# EAGLE board projekt_główny (EAGLE 9.6.2)
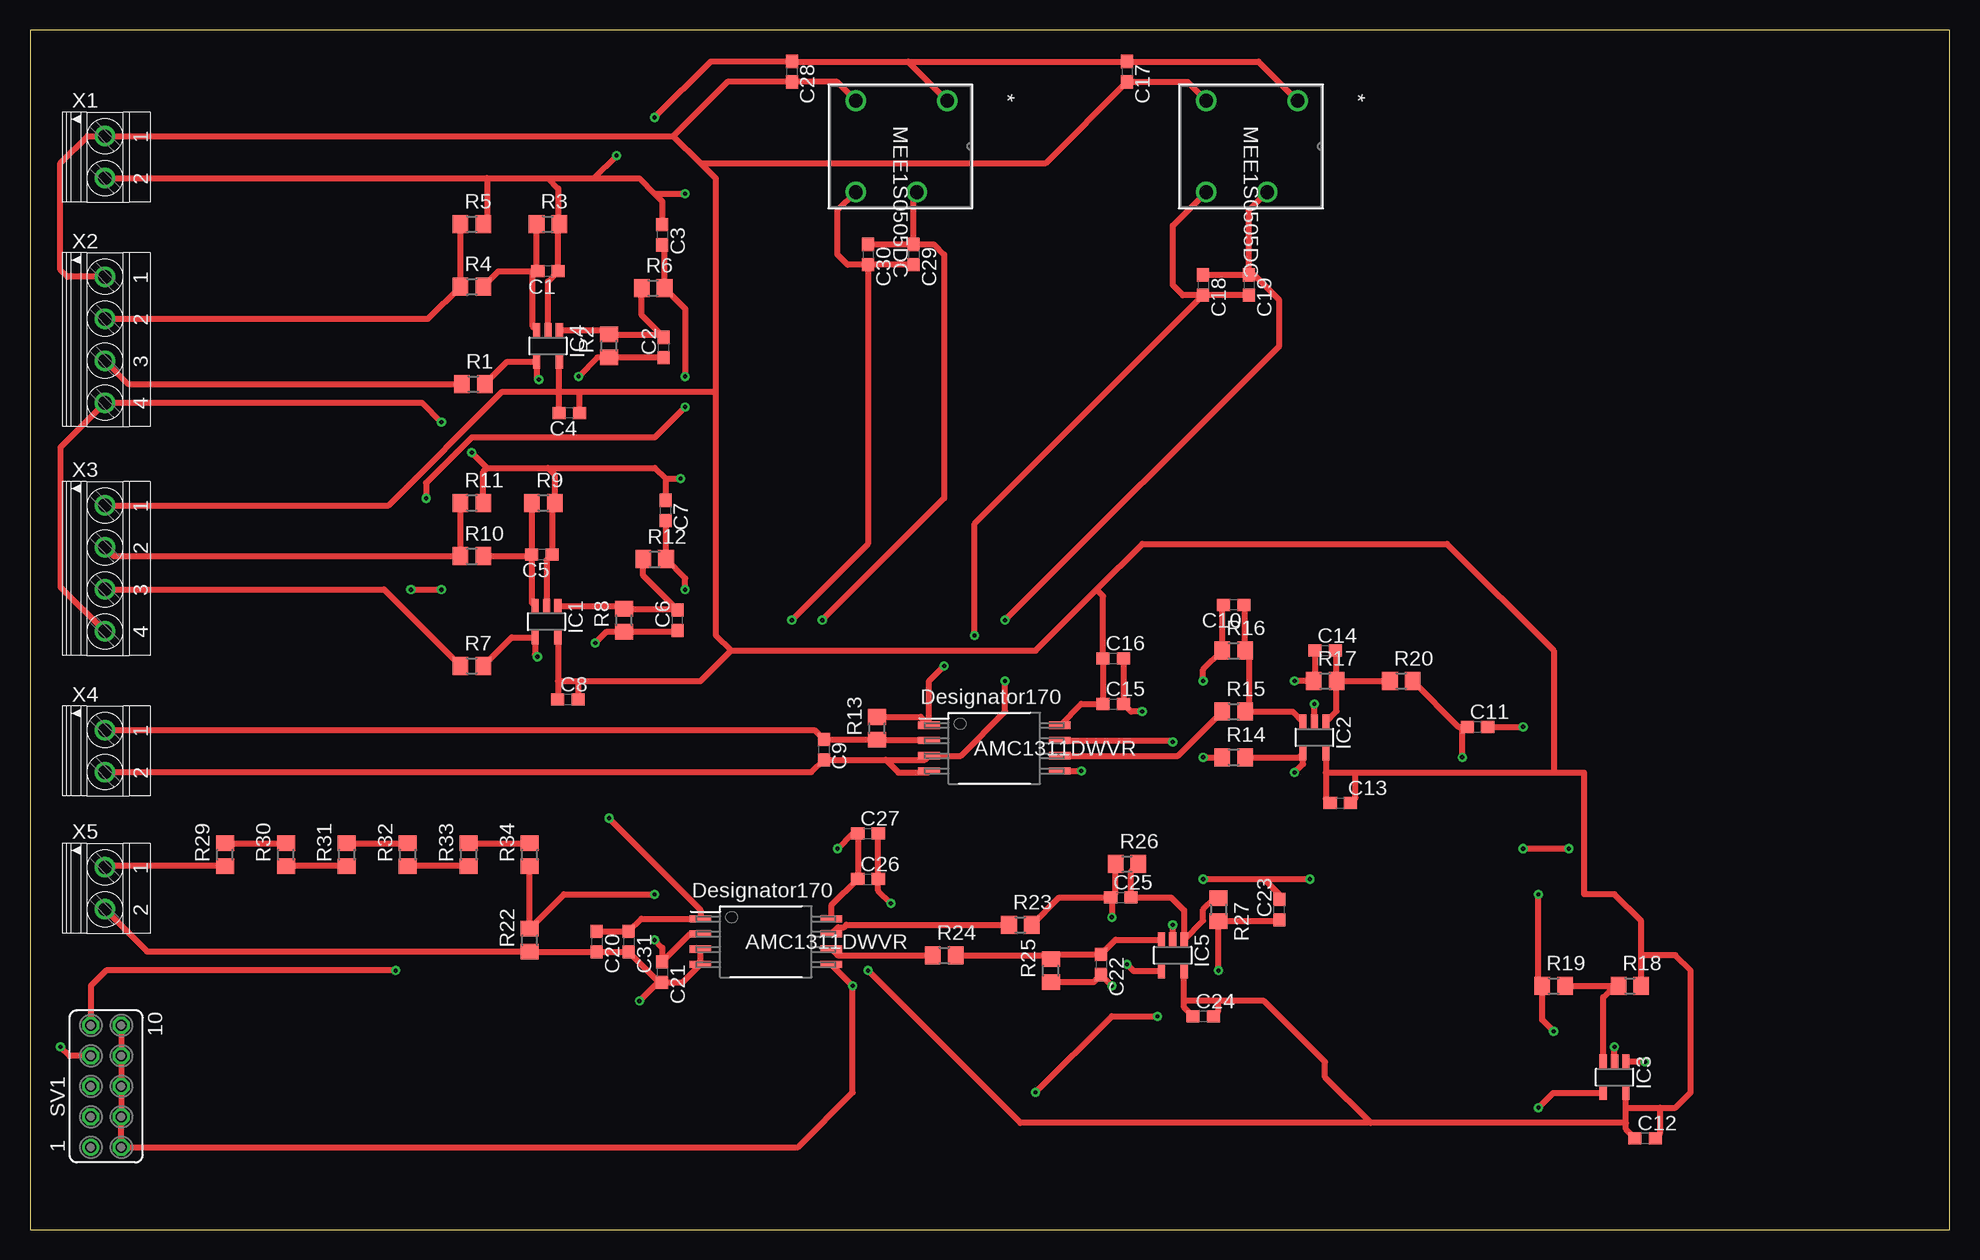
[diagram p0: board, top side]
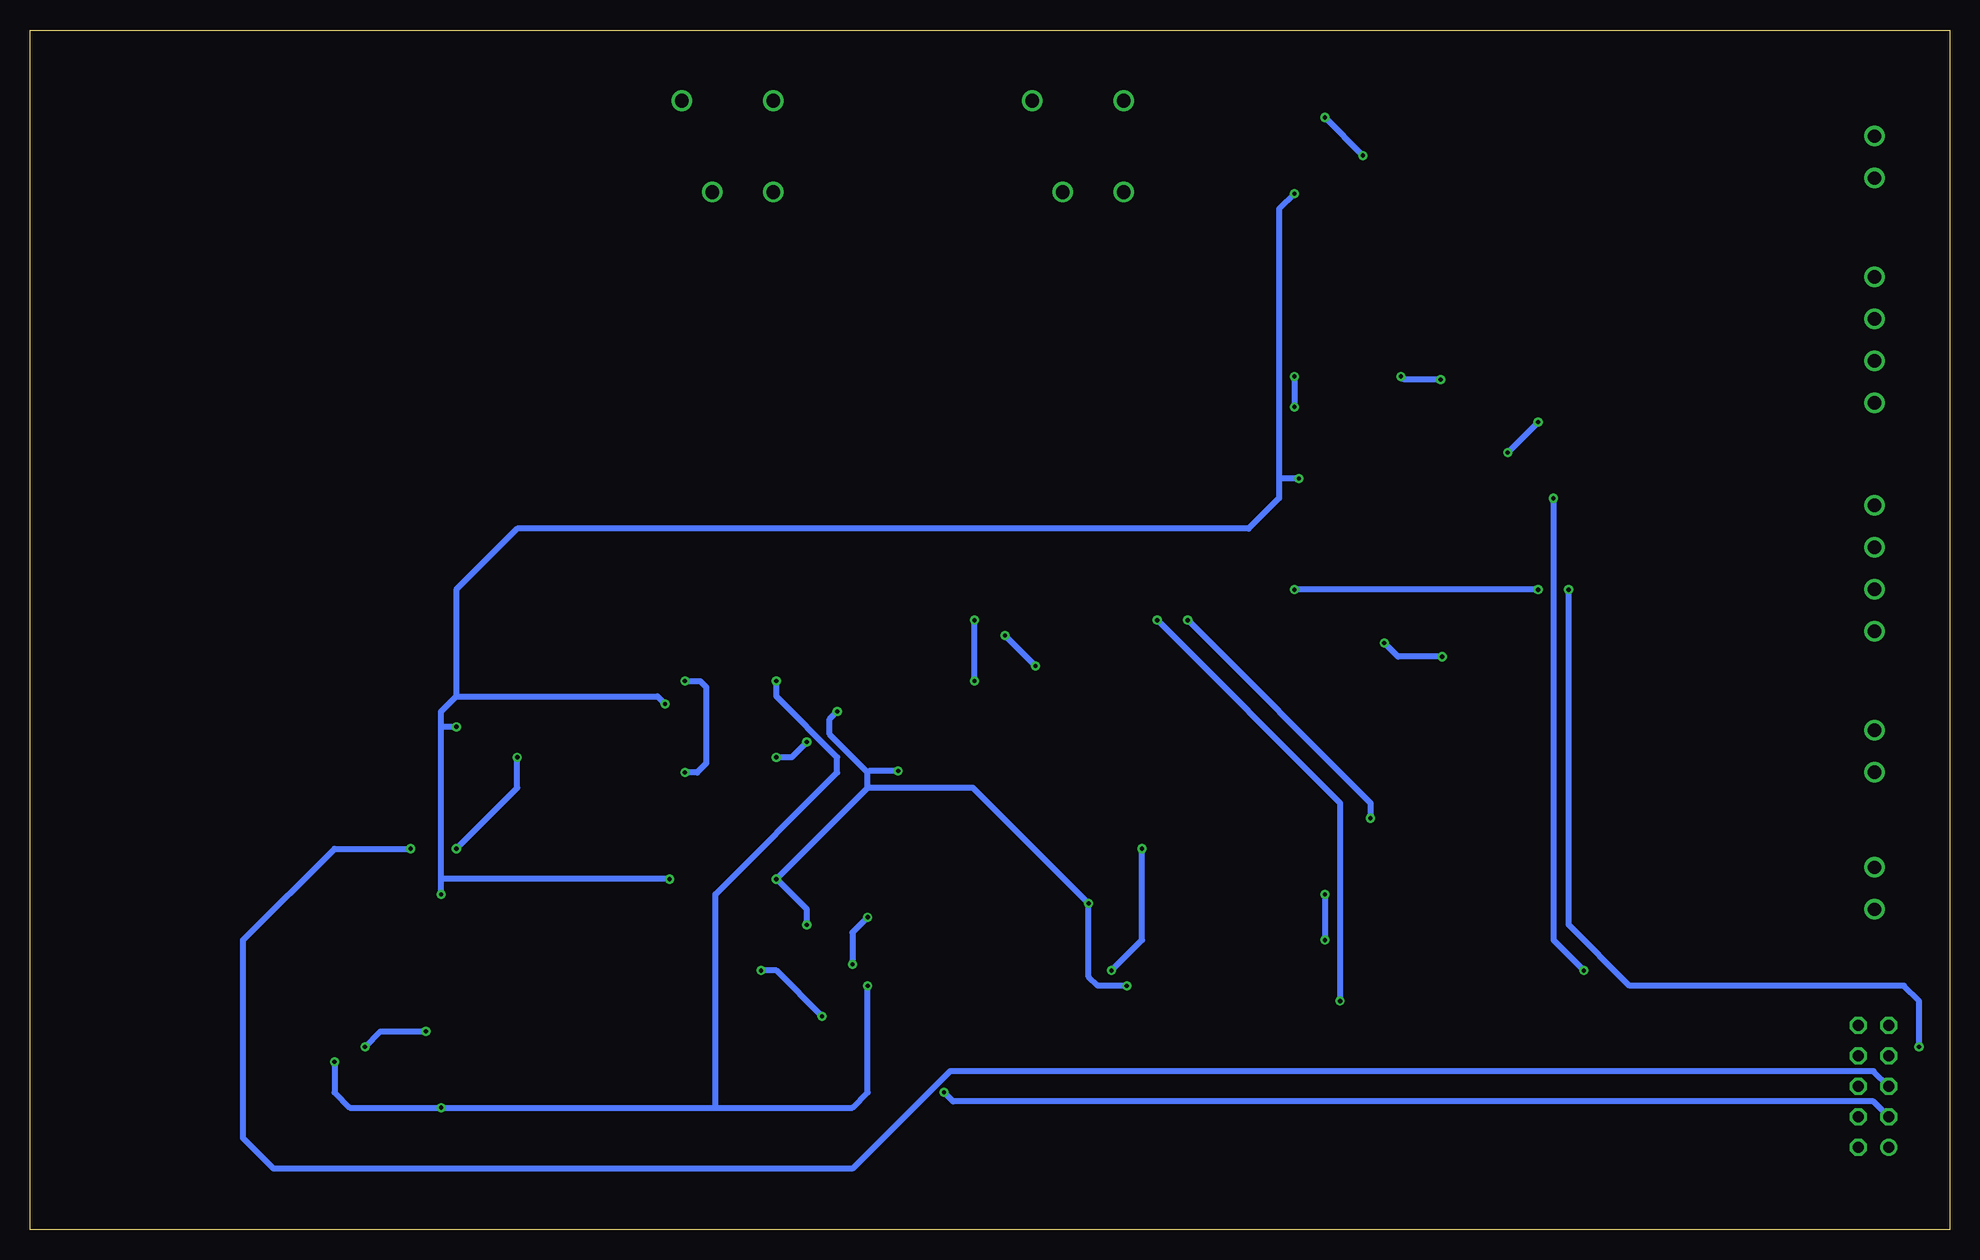
[diagram p1: board, bottom side, seen from below]

Size 160 x 100 mm. Coordinates in mm from the lower left corner, seen from the top.
Outline: 0,0 160,0 160,100 0,100 0,0
Copper layers (1*16): Top 0.035mm / dielectric 1.5mm / Bottom 0.035mm
Design rules "default": minimum track width 6mil, minimum drill 0.35mm, track to track 6mil, track to pad 6mil, pad to pad 6mil, via to via 6mil, smd to smd 6mil, copper to edge 40mil, drill to drill 6mil, minimum pad ring 10mil, minimum via ring 8mil, stop-mask expansion 4mil, vias tented up to drill 0mil, thermal gap 10mil

## Footprints (pad centres in the part's own frame; a part is rotated, then mirrored left to right if it is on the bottom)
C0603 = smd 1.1 x 1: 1 -0.85,0; 2 0.85,0
SOT23-5 = smd 0.6 x 1.2: 1 -0.95,-1.306; 2 0,-1.306; 3 0.95,-1.306; 4 0.95,1.306; 5 -0.95,1.306
R0805 = smd 1.3 x 1.5: 1 -0.95,0; 2 0.95,0
FE05-2 = drill 0.914: 1 -5.08,1.27 | drill 0.914 octagon: 2 -5.08,-1.27; 3 -2.54,1.27; 4 -2.54,-1.27; 5 0,1.27; 6 0,-1.27; 7 2.54,1.27; 8 2.54,-1.27; 9 5.08,1.27; 10 5.08,-1.27
DWV0008A = smd 1.8 x 0.6: 1 -5.45,1.905; 2 -5.45,0.635; 3 -5.45,-0.635; 4 -5.45,-1.905; 5 5.45,-1.905; 6 5.45,-0.635; 7 5.45,0.635; 8 5.45,1.905
MEE1S0305DC_MUR = drill 1.143 pad 1.651: 1 0,0; 4 0,-7.62; 5 7.62,-7.62; 7 7.62,-2.54
1751248 = drill 1.1 pad 1.7: 1 -1.75,-0.1; 2 1.75,-0.1
1751264 = drill 1.1 pad 1.7: 1 -5.25,-0.1; 2 -1.75,-0.1; 3 1.75,-0.1; 4 5.25,-0.1

## Placement (x,y rotation side)
C1  100p  [C0603]  43.18,79.88 180 top
C2  100p  [C0603]  52.83,73.53 90 top
C3  100n  [C0603]  52.7,82.93 270 top
C4  100n  [C0603]  44.96,68.07 180 top
C5  100p  [C0603]  42.67,56.26 180 top
C6  100p  [C0603]  53.98,50.8 90 top
C7  100n  [C0603]  52.96,59.94 270 top
C8  100n  [C0603]  44.83,44.2 0 top
C9  470p  [C0603]  66.17,40.01 270 top
C10  100p  [C0603]  100.33,52.07 180 top
C11  100p  [C0603]  120.65,41.91 0 top
C12  100n  [C0603]  134.62,7.62 0 top
C13  100n  [C0603]  109.22,35.56 0 top
C14  100p  [C0603]  107.95,48.26 0 top
C15  100n  [C0603]  90.3,43.81 0 top
C16  100p  [C0603]  90.3,47.62 0 top
C17  100n  [C0603]  91.44,96.52 270 top
C18  1u  [C0603]  97.79,78.74 270 top
C19  10u  [C0603]  101.6,78.74 270 top
C20  1u  [C0603]  47.24,24 270 top
C21  100p  [C0603]  52.7,21.46 270 top
C22  100p  [C0603]  89.28,22.1 270 top
C23  100p  [C0603]  104.14,26.67 90 top
C24  100n  [C0603]  97.79,17.78 0 top
C25  100p  [C0603]  90.93,27.69 0 top
C26  100n  [C0603]  69.85,29.21 0 top
C27  100p  [C0603]  69.85,33.02 0 top
C28  100n  [C0603]  63.5,96.52 270 top
C29  1u  [C0603]  73.66,81.28 270 top
C30  10u  [C0603]  69.85,81.28 270 top
C31  100n  [C0603]  49.91,24 270 top
IC1  OPA322  [SOT23-5]  43.05,50.67 180 top
IC2  OPA322  [SOT23-5]  107.06,41.02 180 top
IC3  OPA322  [SOT23-5]  132.08,12.7 180 top
IC4  OPA322  [SOT23-5]  43.18,73.66 180 top
IC5  OPA322  [SOT23-5]  95.25,22.86 180 top
R1  3K6  [R0805]  36.96,70.48 0 top
R2  10k  [R0805]  48.26,73.66 90 top
R3  10K  [R0805]  43.18,83.82 0 top
R4  1K5  [R0805]  36.83,78.61 0 top
R5  10K  [R0805]  36.83,83.82 0 top
R6  10  [R0805]  51.94,78.49 0 top
R7  3K6  [R0805]  36.83,46.99 0 top
R8  10k  [R0805]  49.53,50.8 90 top
R9  10K  [R0805]  42.8,60.58 0 top
R10  1K5  [R0805]  36.83,56.13 0 top
R11  10K  [R0805]  36.83,60.58 0 top
R12  10  [R0805]  52.07,55.88 0 top
R13  18K  [R0805]  70.61,41.78 90 top
R14  12k  [R0805]  100.33,39.37 0 top
R15  12K  [R0805]  100.33,43.18 0 top
R16  10K  [R0805]  100.33,48.26 0 top
R17  24K  [R0805]  107.95,45.72 0 top
R18  18K  [R0805]  133.35,20.32 0 top
R19  18K  [R0805]  127,20.32 0 top
R20  10  [R0805]  114.3,45.72 0 top
R22  20K  [R0805]  41.66,24.13 90 top
R23  12k  [R0805]  82.55,25.4 0 top
R24  12K  [R0805]  76.2,22.86 0 top
R25  10K  [R0805]  85.09,21.59 90 top
R26  24K  [R0805]  91.44,30.48 0 top
R27  10  [R0805]  99.06,26.67 270 top
R29  665K  [R0805]  16.26,31.24 90 top
R30  665K  [R0805]  21.34,31.24 90 top
R31  665K  [R0805]  26.42,31.24 90 top
R32  665K  [R0805]  31.5,31.24 90 top
R33  665K  [R0805]  36.58,31.24 90 top
R34  665K  [R0805]  41.66,31.24 90 top
SV1  [FE05-2]  6.35,11.94 90 top
U1  AMC1311DWVR  [DWV0008A]  80.39,40.13 0 top
U2  MEE1S0505DC  [MEE1S0305DC_MUR]  105.66,94.11 270 top
U3  AMC1311DWVR  [DWV0008A]  61.34,24 0 top
U4  MEE1S0505DC  [MEE1S0305DC_MUR]  76.45,94.11 270 top
X1  1751248  [1751248]  6.35,89.41 270 top
X2  1751264  [1751264]  6.35,74.17 270 top
X3  1751264  [1751264]  6.35,55.12 270 top
X4  1751248  [1751248]  6.35,39.88 270 top
X5  1751248  [1751248]  6.35,28.45 270 top

## Library data of the parts
C1-C31 = rcl; SPICEPREFIX: C
IC1-IC5 = linear
R1-R20 R22-R27 R29-R34 = rcl; SPICEPREFIX: R
SV1 = con-lsta; OC_FARNELL: unknown; OC_NEWARK: unknown
U1 U3 = untitled; COPYRIGHT: Copyright (C) 2023 Ultra Librarian. All rights reserved.; MANUFACTURER_PART_NUMBER: AMC1311DWVR; MFR_NAME: Texas Instruments; REFDES: RefDes; TYPE: TYPE
U2 U4 = untitled2; COPYRIGHT: Copyright (C) 2023 Ultra Librarian. All rights reserved.; MANUFACTURER_PART_NUMBER: MEE1S0305DC; MFR_NAME: Murata
X1 X4 X5 = con-phoenix-350; OC_FARNELL: unknown; OC_NEWARK: unknown
X2 X3 = con-phoenix-350; MPN: 1751264; OC_FARNELL: unknown; OC_NEWARK: 10R0934

## Nets
2.5V: C10.2 C22.2 IC3.1 IC3.4 R16.1 R25.1
+5V: C4.1 C4.2 C8.1 C8.2 C12.1 C12.2 C13.1 C13.2 C15.1 C16.1 C17.2 C24.1 C24.2 C26.1 C27.1 C28.2 IC1.5 IC2.5 IC3.5 IC4.5 IC5.5 R18.2 U1.8 U2.4 U3.8 U4.4 X1.1 X2.1 X3.1
GND: C1.1 C3.1 C5.1 C7.1 C11.2 C15.2 C16.2 C17.1 C23.2 C26.2 C27.2 C28.1 IC1.2 IC2.2 IC3.2 IC4.2 IC5.2 R3.2 R5.2 R9.2 R11.2 R19.1 SV1.2 SV1.4 SV1.6 SV1.8 SV1.10 U1.5 U2.1 U3.5 U4.1 X1.2 X2.4 X3.4
GND_ISO: C9.2 C18.1 C19.1 U1.3 U1.4 U2.7 X4.2
GND_ISO2: C20.2 C21.2 C29.1 C30.1 C31.2 R22.1 U3.3 U3.4 U4.7 X5.2
N$1: C2.1 IC4.4 R1.2 R2.1
N$2: R1.1 X2.3
N$3: C2.2 IC4.1 R2.2 R6.1
N$4: C1.2 IC4.3 R3.1 R4.2
N$5: R4.1 R5.1 X2.2
N$6: C3.2 R6.2 SV1.9
N$7: C6.1 IC1.4 R7.2 R8.1
N$8: R7.1 X3.3
N$9: C6.2 IC1.1 R8.2 R12.1
N$10: C5.2 IC1.3 R9.1 R10.2
N$11: R10.1 R11.1 X3.2
N$12: C7.2 R12.2 SV1.7
N$13: C9.1 R13.1 U1.2 X4.1
N$14: C14.1 IC2.4 R14.2 R17.1
N$15: IC3.3 R18.1 R19.2
N$16: R15.1 U1.6
N$17: R14.1 U1.7
N$18: C11.1 R20.2 SV1.5
N$19: C14.2 IC2.1 R17.2 R20.1
N$20: C10.1 IC2.3 R15.2 R16.2
N$23: C18.2 C19.2 R13.2 U1.1 U2.5
N$25: C21.1 R22.2 R34.1 U3.2
N$26: C25.1 IC5.4 R23.2 R26.1
N$27: R24.1 U3.6
N$28: R23.1 U3.7
N$29: C25.2 IC5.1 R26.2 R27.1
N$30: C22.1 IC5.3 R24.2 R25.2
N$32: C20.1 C29.2 C30.2 C31.1 U3.1 U4.5
N$36: R33.2 R34.2
N$37: R32.1 R33.1
N$38: R31.2 R32.2
N$39: R30.1 R31.1
N$40: R29.2 R30.2
N$41: R29.1 X5.1
OUT4: C23.1 R27.2 SV1.3

## Tracks (layer width: path | path; a pad name or v marks a point on that pad's centre or on a via)
2.5V  (via drill 0.35)
  Top 0.5: C10.2 99.38,51.97 R16.1 97.79,46.67 v97.79,45.72 | R25.1 88.67,20.64 C22.2 89.28,21.21 v90.17,20.32 | IC3.1 134.58,14.01 v134.62,13.97 | v125.73,10.16 126.96,11.39 IC3.4
  Bottom 0.5: v134.62,13.97 134.62,11.43 133.35,10.16 v125.73,10.16 102.87,10.16 | 102.87,10.16 91.44,10.16 90.17,11.43 v90.17,20.32 | 102.87,10.16 102.87,27.94 92.71,38.1 92.71,39.37 97.79,44.45 v97.79,45.72
+5V  (via drill 0.35)
  Top 0.5: C4.2 44.11,69.85 | 44.11,69.85 44.11,72.33 IC4.5 | IC1.5 44,45.72 | 44,45.72 44,44.22 C8.1 | U1.8 87.62,43.81 C15.1 C16.1 89.45,52.79 88.9,53.34 | IC2.5 108.01,38.1 | 108.01,38.1 108.01,35.92 C13.1 | U3.8 66.79,27 C26.1 C27.1 68.58,33.02 v67.31,31.75 | C24.1 96.2,18.52 96.2,19.05 | 96.2,19.05 IC5.5 | 53.62,91.16 X1.1 4.8,91.16 2.54,88.9 2.54,80.01 3.13,79.42 X2.1 | 58.42,48.26 57.15,49.53 57.15,69.85 | 53.62,91.16 55.88,88.9 | 55.88,88.9 57.15,87.63 57.15,69.85 | 44.11,69.85 45.72,69.85 | 45.72,69.85 57.15,69.85 | C4.1 45.81,69.76 45.72,69.85 | U4.4 67.27,95.67 C28.2 58.13,95.67 53.62,91.16 | U2.4 96.48,95.67 C17.2 84.67,88.9 55.88,88.9 | 44,45.72 45.72,45.72 | 45.72,45.72 55.88,45.72 58.42,48.26 | C8.2 45.72,44.23 45.72,45.72 | 88.9,53.34 83.82,48.26 58.42,48.26 | 88.9,53.34 92.71,57.15 118.11,57.15 127,48.26 127,38.1 | 108.01,38.1 110.49,38.1 | 110.49,38.1 127,38.1 | 127,38.1 129.54,38.1 129.54,27.94 132.08,27.94 134.3,25.72 134.3,22.86 | C13.2 110.49,35.98 110.49,38.1 | R18.2 134.3,22.86 | C12.1 133.03,8.36 133.03,8.89 | 133.03,8.89 133.03,10.16 | 133.03,10.16 IC3.5 | 133.03,10.16 135.89,10.16 | 135.89,10.16 137.16,10.16 138.43,11.43 138.43,21.59 137.16,22.86 134.3,22.86 | C12.2 135.89,8.04 135.89,10.16 | 133.03,8.89 111.76,8.89 | 111.76,8.89 107.95,12.7 107.95,13.97 102.87,19.05 99.06,19.05 | 99.06,19.05 96.2,19.05 | C24.2 99.06,18.2 99.06,19.05 | 111.76,8.89 82.55,8.89 v69.85,21.59 | X3.1 29.89,60.37 39.37,69.85 44.11,69.85
  Bottom 0.5: v69.85,21.59 67.31,24.13 v67.31,31.75
GND  (via drill 0.35)
  Top 0.5: 44.03,83.72 C1.1 43.18,79.03 IC4.2 | 44.03,83.72 R3.2 | R5.2 38.1,84.14 38.1,87.63 | X1.2 38.07,87.66 38.1,87.63 | 38.1,87.63 43.18,87.63 | 43.18,87.63 44.03,86.78 44.03,83.72 | 43.18,87.63 46.99,87.63 | 46.99,87.63 50.8,87.63 52.07,86.36 | 52.07,86.36 52.7,85.72 C3.1 | IC1.2 43.05,55.79 C5.1 43.52,60.35 R9.2 43.75,62.93 43.18,63.5 | R11.2 37.78,63.18 38.1,63.5 | 38.1,63.5 43.18,63.5 | 43.18,63.5 52.07,63.5 52.96,62.61 | 52.96,62.61 C7.1 | C16.2 C15.2 91.78,43.18 v92.71,43.18 | U1.5 v87.63,38.23 | IC2.2 v107.06,43.81 | C27.2 C26.2 70.7,28.23 v71.75,27.18 | U3.5 v68.57,20.32 v68.58,20.32 68.58,11.43 64.01,6.86 SV1.2 SV1.4 SV1.6 SV1.8 SV1.10 | IC5.2 v95.25,25.4 | v97.79,29.21 102.87,29.21 | 102.87,29.21 104.14,27.94 C23.2 | 102.87,29.21 v106.68,29.21 | 73.19,97.37 C28.1 56.73,97.37 v52.07,92.71 | 73.19,97.37 U4.1 | v48.9,89.53 46.99,87.63 | U2.1 102.4,97.37 C17.1 73.19,97.37 | 52.07,86.36 v54.61,86.36 | 52.96,62.61 v54.23,62.61 | C11.2 v124.46,41.91 | IC3.2 v132.08,15.24 | v127,16.51 126.05,17.46 R19.1 125.73,20.64 v125.73,27.94 | X3.4 2.54,53.58 2.54,65.21 X2.4 32.68,68.92 v34.29,67.31 | v36.83,64.77 38.1,63.5
  Bottom 0.5: v87.63,38.23 90.04,38.23 90.17,38.1 | 90.17,38.1 93.34,41.27 93.34,42.55 v92.71,43.18 | v107.06,43.81 107.7,44.45 124.46,44.45 | v68.58,20.32 70.99,20.32 71.75,21.08 v71.75,27.18 81.41,36.83 90.17,36.83 | v95.25,25.4 95.25,26.67 v97.79,29.21 90.17,36.83 | v106.68,29.21 125.73,29.21 | v52.07,92.71 v48.9,89.53 | v54.61,86.36 55.88,85.09 55.88,62.74 | 55.88,62.74 55.88,60.96 58.42,58.42 119.38,58.42 124.46,53.34 124.46,44.45 | v54.23,62.61 55.75,62.61 55.88,62.74 | 125.73,29.21 125.73,41.91 | 125.73,41.91 125.73,43.18 124.46,44.45 | v124.46,41.91 125.73,41.91 | v132.08,15.24 130.81,16.51 v127,16.51 | v125.73,27.94 125.73,29.21 | 90.17,36.83 90.17,38.1 | v34.29,67.31 v36.83,64.77
GND_ISO  (via drill 0.35)
  Top 0.5: 71.33,39.16 C9.2 65.14,38.13 X4.2 | 71.33,39.16 72.39,38.1 74.81,38.1 U1.4 | 71.33,39.16 74.6,39.16 U1.3 77.6,39.5 81.28,43.18 v81.28,45.72 | C18.1 C19.1 | C19.1 101.6,84.96 U2.7 | v81.28,50.8 104.14,73.66 104.14,77.47 102.02,79.59 C19.1
  Bottom 0.5: v81.28,45.72 v81.28,50.8
GND_ISO2  (via drill 0.35)
  Top 0.5: X5.2 9.77,23.18 R22.1 41.68,23.15 C20.2 C31.2 52.45,20.61 C21.2 | C21.2 54.41,20.61 U3.4 U3.3 | C30.1 C29.1 | C29.1 73.66,86.23 U4.7 | C29.1 75.35,82.13 76.2,81.28 76.2,60.96 v66.04,50.8 | v50.8,19.05 52.36,20.61 C21.2
  Bottom 0.5: v66.04,50.8 50.8,35.56 v50.8,19.05
N$1  (via drill 0.35)
  Top 0.5: C2.1 52.8,72.71 R2.1 47.31,72.71 v45.72,71.12 | R1.2 39.78,72.35 IC4.4 42.23,71.05 v42.42,70.87
  Bottom 0.5: v42.42,70.87 45.47,70.87 v45.72,71.12
N$2
  Top 0.5: X2.3 8.18,70.48 R1.1
N$3
  Top 0.5: IC4.1 47.9,74.97 R2.2 52.6,74.61 C2.2 50.99,76.22 R6.1
N$4
  Top 0.5: R4.2 39.05,79.88 41.91,79.88 | 41.91,79.88 C1.2 42.23,79.98 R3.1 | IC4.3 41.91,75.29 41.91,79.88
N$5
  Top 0.5: R5.1 R4.1 33.19,75.92 X2.2
N$6  (via drill 0.35)
  Top 0.5: C3.2 52.89,81.89 R6.2 54.61,76.77 v54.61,71.12 | v54.61,68.58 52.07,66.04 36.83,66.04 33.02,62.23 v33.02,60.96 | v30.48,21.59 6.35,21.59 5.08,20.32 SV1.9
  Bottom 0.5: v54.61,71.12 v54.61,68.58 | v33.02,60.96 33.02,24.13 v30.48,21.59
N$7  (via drill 0.35)
  Top 0.5: C6.1 53.88,49.85 R8.1 48.07,49.85 v47.12,48.9 | R7.2 40.16,49.37 IC1.4 42.1,47.94 v42.29,47.75
  Bottom 0.5: v42.29,47.75 45.97,47.75 v47.12,48.9
N$8
  Top 0.5: X3.3 29.5,53.37 R7.1
N$9
  Top 0.5: IC1.1 49.3,51.98 R8.2 53.88,51.75 C6.2 51.12,54.51 R12.1
N$10
  Top 0.5: R10.2 41.7,56.13 C5.2 | C5.2 41.85,56.29 R9.1 | C5.2 41.82,52.26 IC1.3
N$11
  Top 0.5: R11.1 R10.1 6.98,56.13 X3.2
N$12  (via drill 0.35)
  Top 0.5: C7.2 53.02,59.03 R12.2 54.61,54.29 v54.61,53.34 | SV1.7 3.3,14.48 v2.54,15.24 | v31.75,53.34 v34.29,53.34
  Bottom 0.5: v2.54,15.24 2.54,19.05 3.81,20.32 26.67,20.32 31.75,25.4 v31.75,53.34 | v34.29,53.34 v54.61,53.34
N$13
  Top 0.5: U1.2 74.88,40.83 R13.1 70.59,40.85 C9.1 65.39,41.63 X4.1
N$14  (via drill 0.35)
  Top 0.5: R14.2 105.77,39.37 IC2.4 106.11,38.8 v105.41,38.1 | C14.1 107.1,45.82 R17.1 v105.41,45.72
  Bottom 0.5: v105.41,45.72 104.14,45.72 103.63,45.21 103.63,38.86 104.39,38.1 v105.41,38.1
N$15
  Top 0.5: R19.2 132.08,20.32 | 132.08,20.32 R18.1 | IC3.3 131.13,19.37 132.08,20.32
N$16
  Top 0.5: U1.6 95.7,39.5 R15.1
N$17  (via drill 0.35)
  Top 0.5: U1.7 95.12,40.77 v95.25,40.64 | v97.79,39.37 R14.1
  Bottom 0.5: v95.25,40.64 96.52,39.37 v97.79,39.37
N$18  (via drill 0.35)
  Top 0.5: R20.2 119.06,41.91 119.38,41.91 | 119.38,41.91 C11.1 | v128.27,31.75 v124.46,31.75 | v119.38,39.37 119.38,41.91
  Bottom 0.5: SV1.5 6.35,13.21 83.31,13.21 91.44,5.08 139.7,5.08 142.24,7.62 142.24,24.13 134.62,31.75 v128.27,31.75 | v124.46,31.75 119.38,36.83 v119.38,39.37
N$19
  Top 0.5: R17.2 108.9,48.16 C14.2 | IC2.1 108.9,43.22 R17.2 | R17.2 R20.1
N$20
  Top 0.5: R15.2 101.6,43.18 | 101.6,43.18 105.26,43.18 IC2.3 | 101.6,43.18 101.6,47.94 R16.2 101.28,51.97 C10.1
N$23  (via drill 0.35)
  Top 0.5: R13.2 74.25,42.73 U1.1 74.94,45.73 v76.2,46.99 | C19.2 C18.2 | C18.2 96.1,77.89 95.25,78.74 95.25,83.69 U2.5 | v78.74,49.53 78.74,58.84 C18.2
  Bottom 0.5: v76.2,46.99 v78.74,49.53
N$25  (via drill 0.35)
  Top 0.5: R34.1 R22.2 44.52,27.94 v52.07,27.94 | U3.2 55.03,24.64 C21.1 52.7,23.5 v52.07,24.13
  Bottom 0.5: v52.07,27.94 v52.07,24.13
N$26  (via drill 0.35)
  Top 0.5: R23.2 85.79,27.69 C25.1 | C25.1 90.49,28.09 R26.1 | C25.1 90.17,27.6 v90.17,26.04 | v91.44,22.1 91.98,21.55 IC5.4
  Bottom 0.5: v90.17,26.04 91.44,24.77 v91.44,22.1
N$27
  Top 0.5: U3.6 67.3,22.86 R24.1
N$28
  Top 0.5: U3.7 67.36,25.21 67.86,25.21 68.05,25.4 R23.1
N$29
  Top 0.5: R26.2 91.78,29.87 C25.2 95.12,27.69 96.2,26.61 IC5.1 97.79,25.76 97.79,26.67 98.74,27.62 R27.1
N$30
  Top 0.5: R24.2 84.77,22.86 R25.2 85.5,22.95 C22.1 90.5,24.17 IC5.3
N$32  (via drill 0.35)
  Top 0.5: C20.1 C31.1 50.97,25.91 U3.1 55.89,26.66 v48.26,34.29 | C29.2 C30.2 | C30.2 68.16,80.43 67.31,81.28 67.31,84.96 U4.5 | C30.2 69.85,57.15 v63.5,50.8
  Bottom 0.5: v63.5,50.8 48.26,35.56 v48.26,34.29
N$36
  Top 0.5: R33.2 R34.2
N$37
  Top 0.5: R33.1 R32.1
N$38
  Top 0.5: R31.2 R32.2
N$39
  Top 0.5: R31.1 R30.1
N$40
  Top 0.5: R29.2 R30.2
N$41
  Top 0.5: R29.1 6.34,30.29 X5.1
OUT4  (via drill 0.35)
  Top 0.5: C23.1 104.04,25.72 R27.2 v99.06,21.59 | v83.82,11.43 90.17,17.78 v93.98,17.78
  Bottom 0.5: SV1.3 6.35,10.67 83.06,10.67 v83.82,11.43 | v93.98,17.78 97.79,21.59 v99.06,21.59